# EAGLE board ld_v2 (EAGLE 5.04)
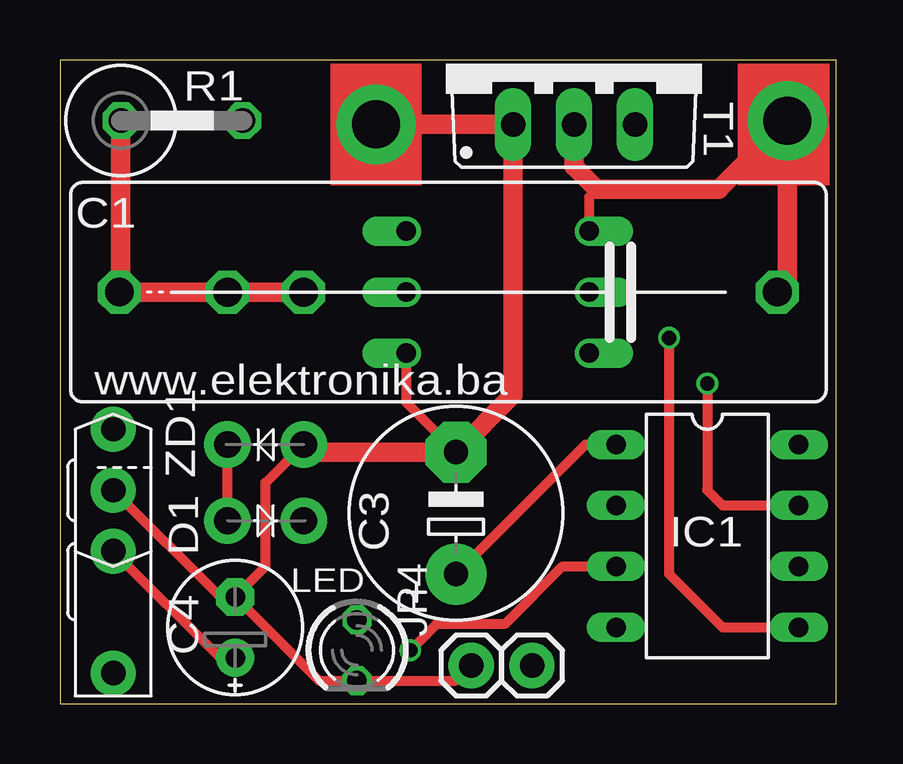
[diagram p0: board, top side]
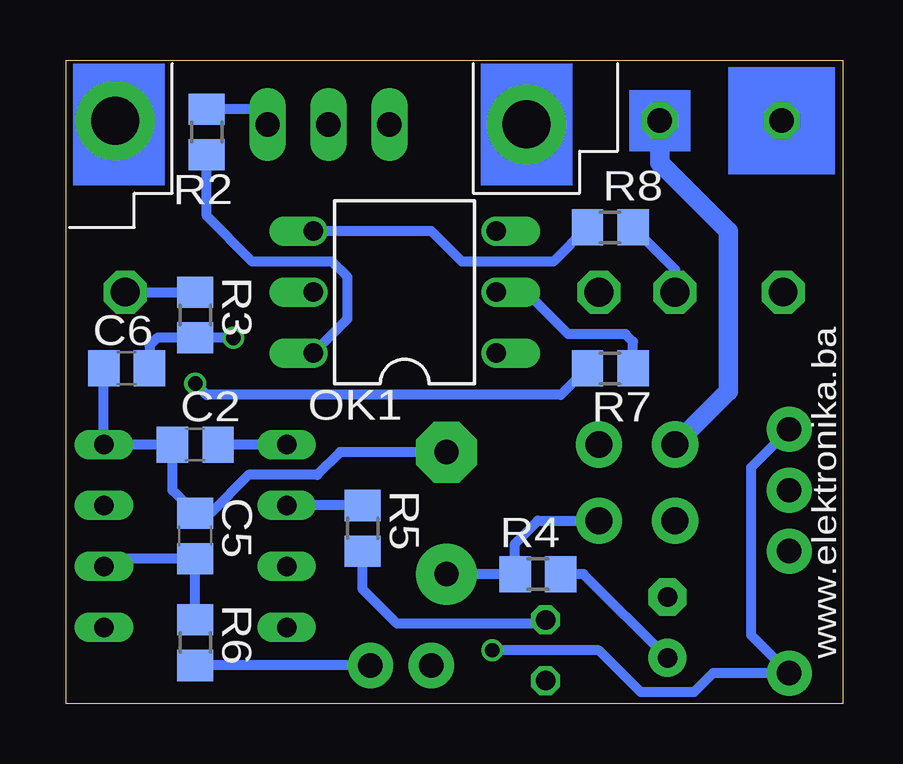
[diagram p1: board, bottom side, seen from below]

Size 32.37 x 26.82 mm. Coordinates in mm from the lower left corner, seen from the top.
Outline: 0,0 32.37,0 32.37,26.82 0,26.82 0,0
Copper layers (1*16): Top 0.035mm / dielectric 1.6mm / Bottom 0.035mm
Design rules "Elecrow_2-layer_PCB_eagle_rule": minimum track width 6mil, minimum drill 12mil, track to track 6mil, track to pad 6mil, pad to pad 6mil, via to via 8mil, smd to smd 0mil, copper to edge 20mil, drill to drill 10mil, minimum pad ring 6mil, minimum via ring 6mil, stop-mask expansion 0mil, vias tented up to drill 100mil, thermal gap 10mil

## Footprints (pad centres in the part's own frame; a part is rotated, then mirrored left to right if it is on the bottom)
C275-093X316 = drill 1.194 octagon: 1 -13.716,0; 2 13.716,0
C0805 = smd 1.3 x 1.5: 1 -0.95,0; 2 0.95,0
E5-8,5 = drill 1.016 pad 2.54 round: + -2.54,0 | drill 1.016 pad 2.54 octagon: - 2.54,0
E2,5-6E = drill 0.813 pad 1.575 round: + -1.27,0 | drill 0.813 pad 1.575 octagon: - 1.27,0
DO41-10_HORI = drill 1.118 pad 1.93 round: A 3.175,0; C 0,0
DIL8 = drill 0.813 long: 1 -3.81,-3.81; 2 -1.27,-3.81; 3 1.27,-3.81; 4 3.81,-3.81; 5 3.81,3.81; 6 1.27,3.81; 7 -1.27,3.81; 8 -3.81,3.81
1X01_2MM = drill 2 pad 3.302 round: 1 0,0
1X01 = drill 1.016 pad 1.88 round: 1 0,0
LED3MM = drill 0.813 octagon: A -1.27,0; K 1.27,0
DIL06 = drill 0.813 offset: 1 -2.54,-3.81; 2 0,-3.81; 3 2.54,-3.81; 4 2.54,3.81; 5 0,3.81; 6 -2.54,3.81
P0613V = drill 1.016 octagon: 1 -2.54,0; 2 2.54,0
R0805 = smd 1.3 x 1.5: 1 -0.95,0; 2 0.95,0
TO220BV = drill 1.016 long: G 2.54,-2.54; T1 -2.54,-2.54; T2 0,-2.54
1X01NS = drill 1.016 pad 1.88 round: 1 0,0

## Placement (x,y rotation side)
C1  0.22uF/~275V X2  [C275-093X316]  16.19,17.14 180 top
C2  100n  [C0805]  26.99,10.79 180 bottom
C3  470uF/16V  [E5-8,5]  16.51,7.94 90 top
C4  47uF/16V  [E2,5-6E]  7.3,3.17 90 top
C5  100n  [C0805]  26.99,6.99 90 bottom
C6  220pF - 2n2  [C0805]  29.84,13.97 180 bottom
D1  1N4007  [DO41-10_HORI]  10.16,7.62 180 top
IC1  PIC12F629/675  [DIL8]  26.99,6.99 270 top
IN  [1X01_2MM]  30.32,24.29 180 top
JP4  [1X01]  17.14,1.59 90 top
LED  [LED3MM]  12.38,2.22 270 top
OK1  MOC3023M  [DIL06]  18.26,17.14 90 bottom
OUT  [1X01_2MM]  13.18,24.13 0 top
R1  470/2W  [P0613V]  5.08,24.29 0 top
R2  820  [R0805]  26.51,23.81 90 bottom
R3  1M  [R0805]  26.99,16.19 270 bottom
R4  100  [R0805]  12.7,5.4 0 bottom
R5  1k  [R0805]  20,7.3 90 bottom
R6  100  [R0805]  26.99,2.54 90 bottom
R7  220  [R0805]  9.68,13.97 180 bottom
R8  1M  [R0805]  9.68,19.84 0 bottom
SWITCH  [1X01]  19.68,1.59 0 top
T1  BTA16-600B  [TO220BV]  21.43,26.67 0 top
TSOP_PIN1  [1X01NS]  2.22,6.35 0 top
TSOP_PIN2  [1X01NS]  2.22,1.27 90 top
TSOP_PIN3  [1X01NS]  2.22,8.89 0 top
TSOP_PIN4  [1X01NS]  2.22,11.43 0 top
ZD1  5v6  [DO41-10_HORI]  6.99,10.79 0 top

## Library data of the parts
C1-C6 R1-R8 = rcl
D1 ZD1 = adafruit
IC1 = microchip
IN JP4 OUT SWITCH TSOP_PIN1-TSOP_PIN4 = SparkFun
LED = led
OK1 = optocoupler
T1 = triac

## Nets
+5V: C2.1 C3.+ D1.C IC1.1 R4.1
BTN: C5.1 IC1.6 R6.2
GND: C2.2 C3.- C4.- C5.2 C6.2 IC1.8 JP4.1 LED.K OK1.1 OUT.1 T1.T1 TSOP_PIN3.1 ZD1.A
IR: IC1.3 TSOP_PIN2.1 TSOP_PIN4.1
LED: IC1.2 R5.2
N$1: LED.A R5.1
N$2: C1.2 R1.1 R8.2
N$3: D1.A R1.2 ZD1.C
N$4: OK1.2 R7.1
N$5: OK1.6 R2.1
N$6: C4.+ R4.2 TSOP_PIN1.1
N$7: R2.2 T1.G
NULL: C1.1 IN.1 OK1.4 R3.1 R8.1 T1.T2
SWITCH: R6.1 SWITCH.1
TRIG: IC1.7 R7.2
ZC: C6.1 IC1.5 R3.2

## Tracks (layer width: path | path; a pad name or v marks a point on that pad's centre or on a via)
+5V
  Top 0.406: C3.+ 21.91,10.79 IC1.1
  Bottom 0.406: IC1.1 C2.1 | C3.+ R4.1 13.65,6.67 12.7,7.62 D1.C
BTN
  Bottom 0.406: IC1.6 30.48,6.04 C5.1 R6.2
GND
  Top 0.406: ZD1.A 8.57,9.21 8.57,5.71 C4.- | JP4.1 16.51,0.95 LED.K 10.79,0.95 C4.- | TSOP_PIN3.1 6.67,4.45 C4.- | OK1.1 14.45,12.54 C3.-
  Top 0.813: ZD1.A 10.48,10.48 C3.- 18.89,12.86 T1.T1 OUT.1
  Bottom 0.406: C3.- 20.95,10.48 21.91,9.53 24.77,9.53 26.36,7.93 C5.2 27.94,8.88 C2.2 IC1.8 C6.2
IR  (via drill 0.6)
  Top 0.406: v14.61,2.22 15.72,3.33 18.57,3.33 20.95,5.71 IC1.3
  Bottom 0.406: v14.61,2.22 10.16,2.22 8.41,0.48 6.19,0.48 5.4,1.27 TSOP_PIN2.1 3.81,2.86 3.81,9.84 TSOP_PIN4.1
LED
  Bottom 0.406: R5.2 IC1.2
N$1
  Bottom 0.406: R5.1 20,4.76 18.57,3.33 12.54,3.33 LED.A
N$2  (via drill 1.2)
  Top 0.813: C1.2 2.54,17.14 | 2.54,17.14 R1.1 | 2.54,17.14 v6.99,17.14 v10.16,17.14
  Bottom 0.406: R8.2 6.99,18.09 v6.99,17.14
N$3
  Top 0.406: D1.A ZD1.C
  Bottom 0.813: R1.2 7.62,22.54 4.76,19.68 4.76,13.02 ZD1.C
N$4
  Bottom 0.406: R7.1 8.73,15.08 9.05,15.4 11.43,15.4 13.18,17.14 OK1.2
N$5
  Bottom 0.406: OK1.6 20.64,16.03 20.64,17.78 21.27,18.41 24.61,18.41 26.51,20.32 R2.1
N$6
  Top 0.406: C4.+ 6.67,1.91 TSOP_PIN1.1
  Bottom 0.406: R4.2 10.79,5.4 C4.+
N$7
  Bottom 0.406: R2.2 24.6,24.76 T1.G
NULL
  Top 0.406: 22.38,21.43 22.07,21.11 OK1.4
  Top 0.813: C1.1 30.32,17.56 IN.1 27.46,21.43 22.38,21.43 21.43,22.38 T1.T2
  Bottom 0.406: R3.1 C1.1 | R8.1 12.06,18.41 15.88,18.41 17.14,19.68 OK1.4
SWITCH
  Bottom 0.406: R6.1 SWITCH.1
TRIG  (via drill 0.6)
  Top 0.406: v26.99,13.34 26.99,8.89 27.62,8.26 IC1.7
  Bottom 0.406: v26.99,13.34 26.51,12.86 11.74,12.86 R7.2
ZC  (via drill 0.6)
  Top 0.406: v25.4,15.24 25.4,5.4 27.62,3.17 IC1.5
  Bottom 0.406: v25.4,15.24 R3.2 28.57,15.24 28.89,14.92 C6.1
(copper drawn outside any net)
  shapes: Bottom area x4, Top area x2

## Text on the board
_tsilk: www.elektronika.ba
_bsilk: www.elektronika.ba